# Altium PCB ELN2_LaboAntenna.PcbDoc
Units mm, origin at the board's own origin, x right, y up, seen from the top; angles counter-clockwise.
Board outline 35 x 35 mm, 4 copper layers (Top Layer, Layer 1, Layer 2, Bottom Layer), stack 1.536 mm thick; 5 components, 4 nets, 15 pads, 26 vias.
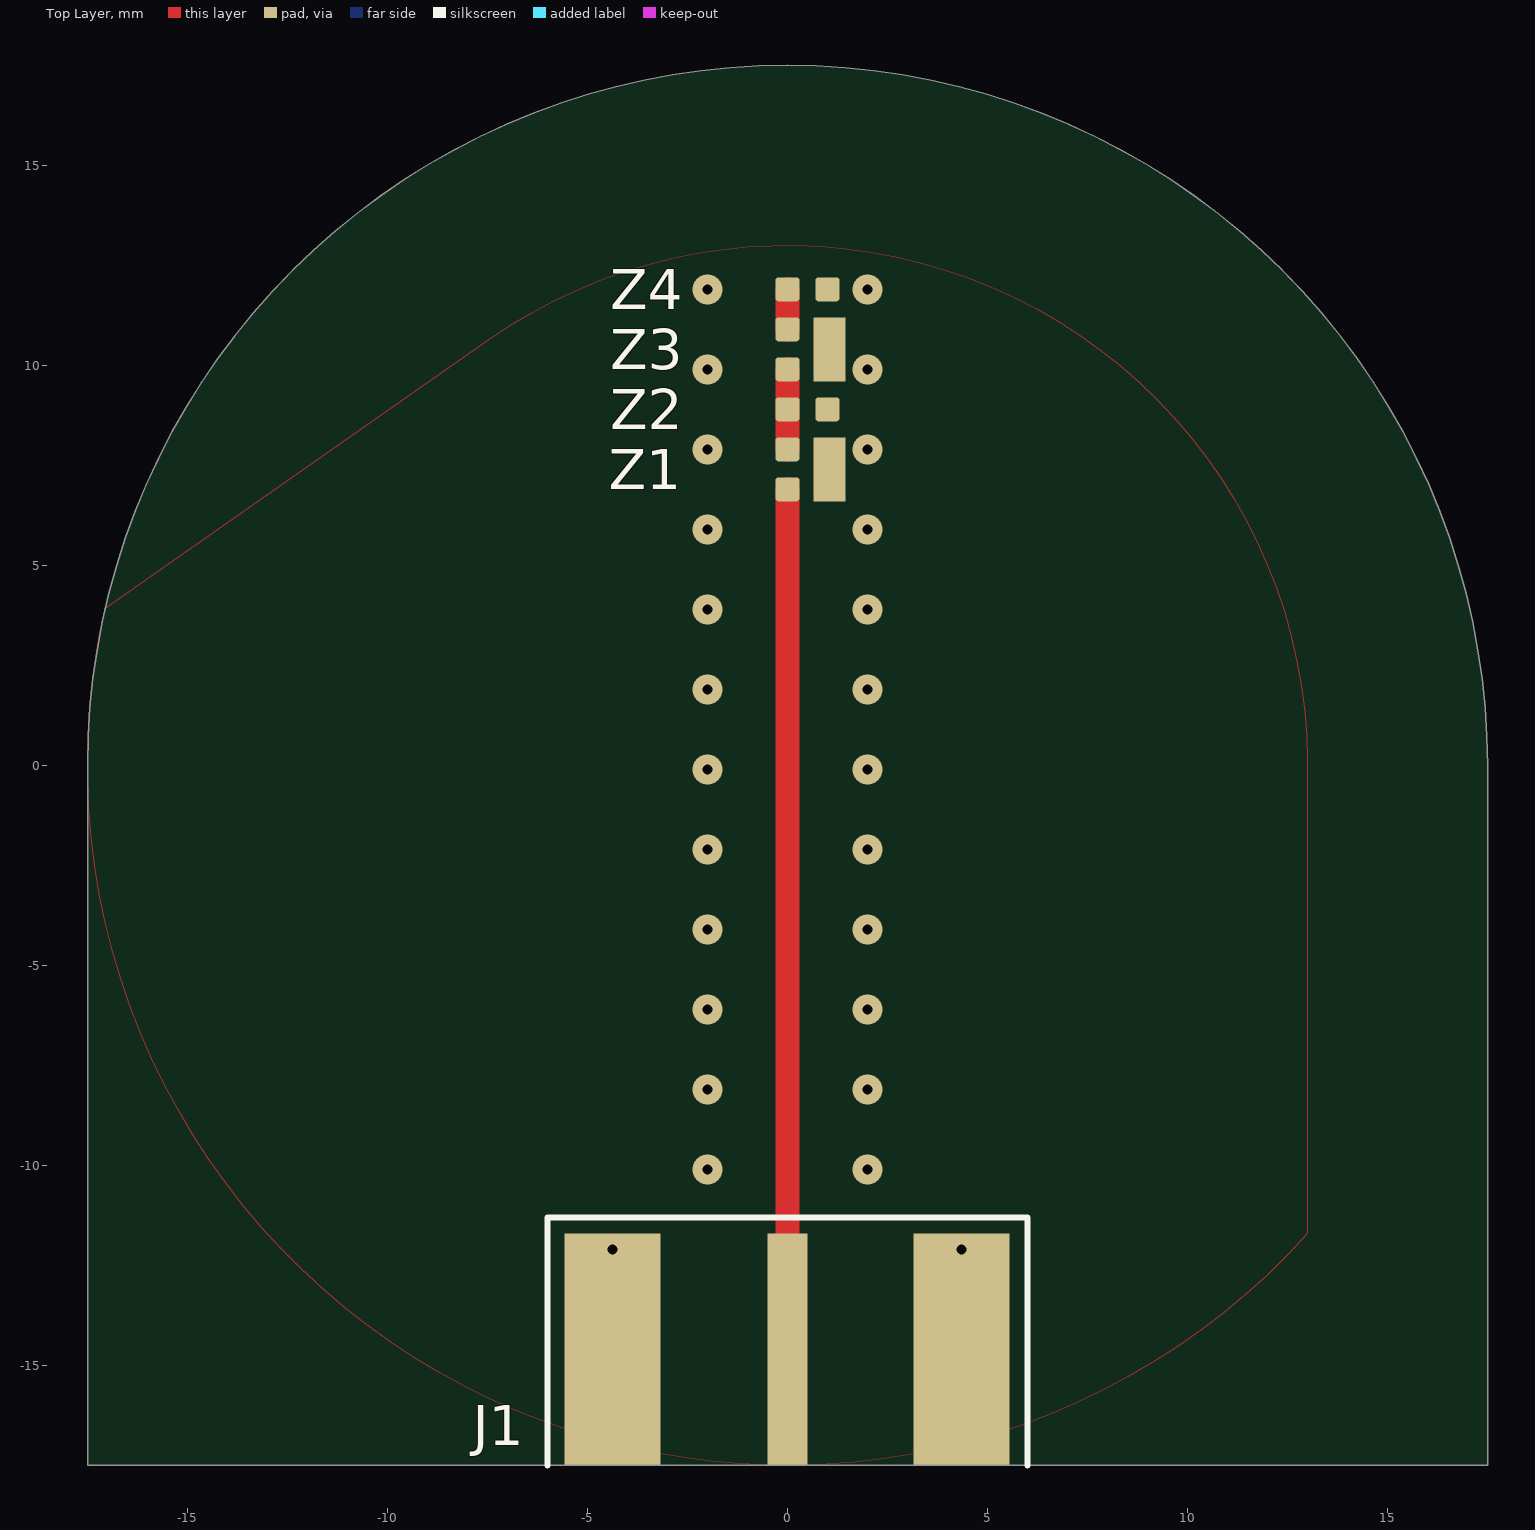
[diagram p0: Top Layer view]
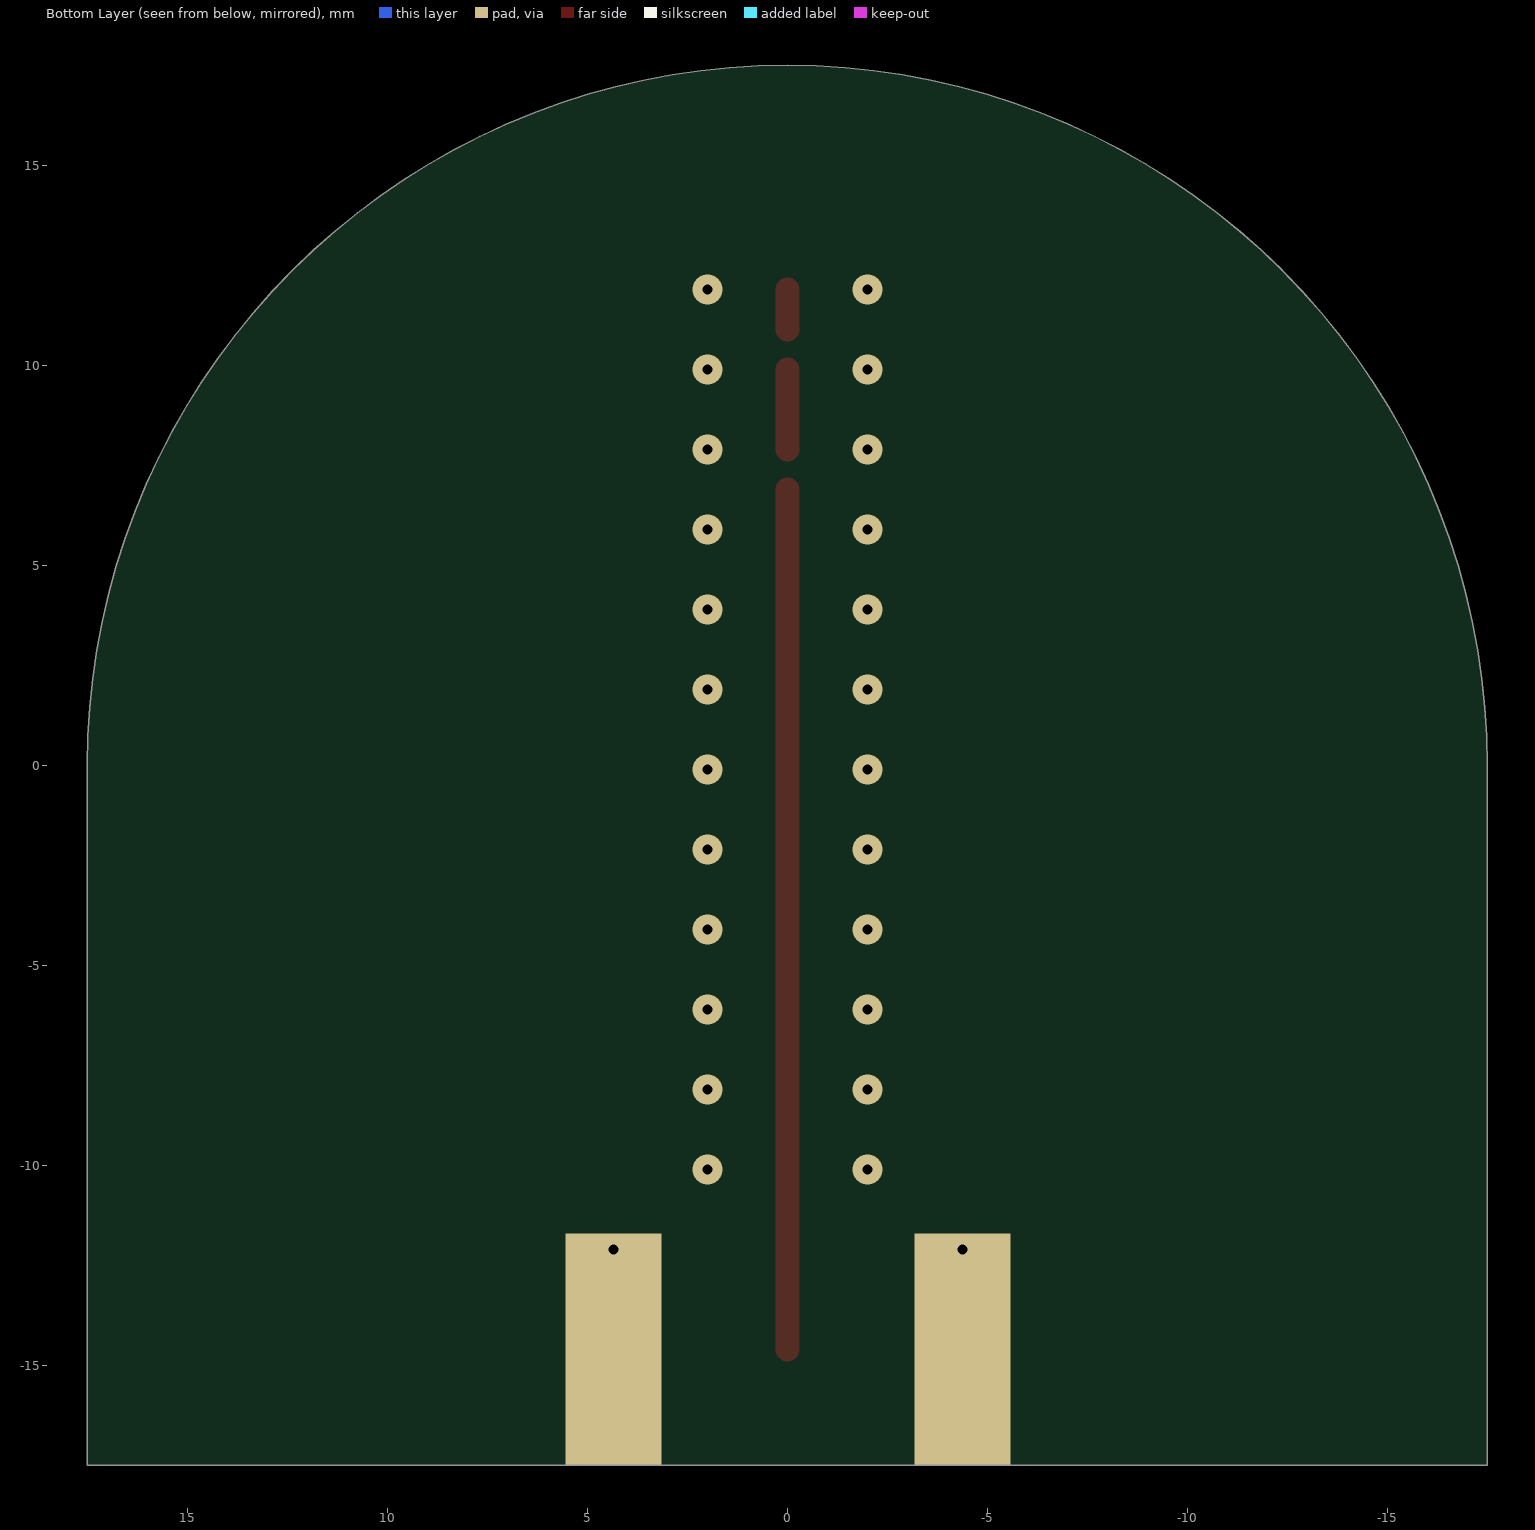
[diagram p1: Bottom Layer view, seen from below]
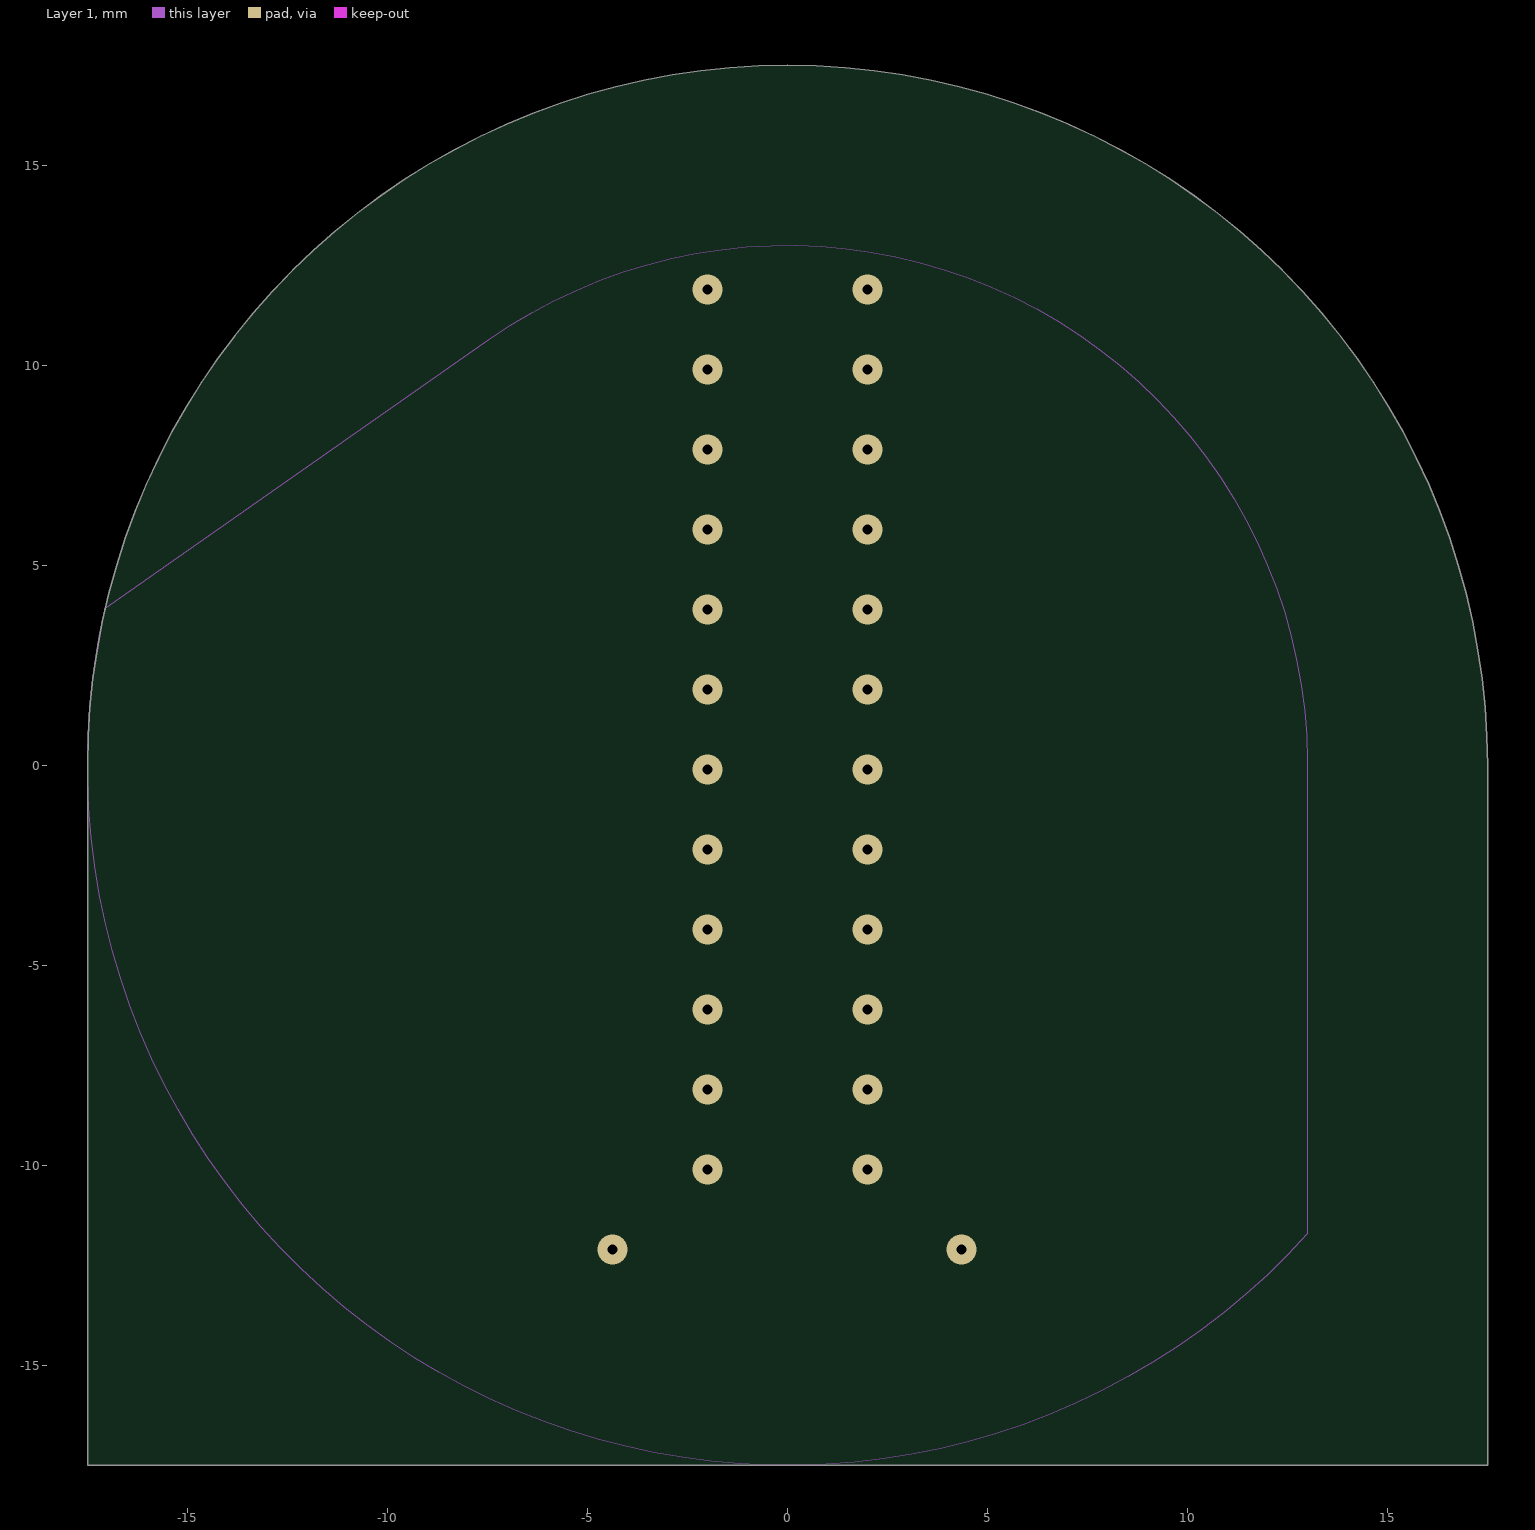
[diagram p2: Layer 1]

## Layer stack, top to bottom
Top Solder: solder mask 0.01, Solder Resist, Dk 3.5
Top Layer: signal copper 0.018
Dielectric 1: prepreg 0.36, PP-006, Dk 4.1
Layer 1: signal copper 0.035
Dielectric 2: prepreg 0.71, PP-006, Dk 4.1
Layer 2: signal copper 0.035
Dielectric1: core 0.36, FR-4, Dk 4.8
Bottom Layer: signal copper 0.018
Bottom Solder: solder mask 0.01, Solder Resist, Dk 3.5

## Board outline
-17.5,-17.5 -17.5,0 cw(c0,0) 17.5,0 17.5,-17.5

## Design rules (kind name [scope] priority, off if disabled: settings)
AssemblyTestPointUsage [All] p1 off:
AssemblyTestpoint [All] p1 off: testpointundercomponent=TRUE minsize=1.016 maxsize=2.54 preferedsize=1.524 minholesize=0 maxholesize=1.016 preferedholesize=0.813 testpointgrid=0.025 usegrid=TRUE gridtolerance=0 allowsidetop=TRUE allowsidebottom=TRUE
BoardOutlineClearance [All] p1 off: gap=0.25 ignorepadtopadclearanceinfootprint=FALSE except(0: Arc-SplitContinuation Track-SplitContinuation SMDPad-SplitContinuation THPad-SplitContinuation Via-SplitContinuation Fill-SplitContinuation Poly-SplitContinuation Region-SplitContinuation Text-SplitContinuation)
Clearance Clearance-xPP-xTP-xTT [All] p1: gap=0.25 ignorepadtopadclearanceinfootprint=FALSE
ComponentClearance [NOT ((InComponent('A1') OR InComponent('M3') OR InComponent('M4'))) vs NOT ((InComponent('A1') OR InComponent('M3') OR InComponent('M4')))] p1: gap=0.25 collisioncheckmode=3 verticalgap=0 showdistances=FALSE
DiffPairsRouting [All] p1: maxlimit=0.25 minlimit=0.25 mostfreqgap=0.25 toplayer_minwidth=0.381 toplayer_maxwidth=0.381 toplayer_prefwidth=0.381 midlayer1_minwidth=0.381 midlayer1_maxwidth=0.381 midlayer1_prefwidth=0.381 midlayer2_minwidth=0.381 midlayer2_maxwidth=0.381 midlayer2_prefwidth=0.381 bottomlayer_minwidth=0.381 bottomlayer_maxwidth=0.381 bottomlayer_prefwidth=0.381 maxuncoupledlength=12.5
Height [All] p1: minheight=0 maxheight=500 prefheight=12.5
HoleSize HoleSize-PTH [All] p1: absolutevalues=TRUE maxlimit=10 minlimit=0.15 maxpercent=80.000 minpercent=20.000
HoleToHoleClearance [All] p1: gap=0.35 allowstackedmicrovias=TRUE
MinimumAnnularRing "Minimum IAR  >0.45mm" [((ObjectKind = 'Pad') OR (ObjectKind = 'Via')) And (Layer = 'MultiLayer') And (HoleDiameter > AsMM(0.45))] p1: minimumring=0.175 // minimum inner annular ring for pads > 0.45mm finished hole size
MinimumAnnularRing "Minimum IAR <=0.45mm" [((ObjectKind = 'Pad') OR (ObjectKind = 'Via')) And (Layer = 'MultiLayer') And (HoleDiameter <= AsMM(0.45))] p2: minimumring=0.1 // minimum inner annular ring for pads <= 0.45mm finished hole size
MinimumSolderMaskSliver [All] p1: minsoldermaskwidth=0.08
PlaneClearance PlaneClearance-IPI [All] p1: clearance=0.25
PlaneConnect [All] p1: planeconnectstyle=Direct reliefexpansion=0.175 reliefentries=4 reliefconductorwidth=0.2 reliefairgap=0.2
PolygonConnect PolygonConnect-xTW [All] p1: connectstyle=Direct reliefconductorwidth=0.5 reliefentries=4 polygonreliefangle="90 Angle" airgapwidth=0.5
RoutingCorners [All] p1: cornerstyle=45-Degree minsetback=2.5 maxsetback=2.5
RoutingVias RoutingVias_1 [All] p1: holewidth=0.25 width=0.7 viastyle="Through Hole" minholewidth=0.25 minwidth=0.6 maxholewidth=0.25 maxwidth=1
SilkToSilkClearance [All] p1 off: silktosilkclearance=0.2
SilkToSolderMaskClearance SilkscreenOverComponentPads [IsPad] p1 off: minsilkscreentomaskgap=0.2 clearancetoexposedcopper=TRUE
SolderMaskExpansion [All] p1: expansion=0 istentingtop=FALSE
UnRoutedNet [All] p1: checkbadconnections=TRUE
Width Width-xTW [All] p1: maxlimit=5 minlimit=0.15 preferedwidth=0.3
16 further rules are at their usual default settings.

## Components (designator, comment, footprint, x,y, rotation, side; value= is the part's Value field where it differs from the comment)
J1 "CONSMA001-G" "SMA EDGE Molex 732511150" 0,-17.5 r90 top locked
Z1 "" "Matching pad 1005 with Ground" 0,7.401 r90 top locked
Z2 "*" "Matching pad 1005" 0.5,8.9 r180 top locked
Z3 "" "Matching pad 1005 with Ground" 0,10.4 r90 top locked
Z4 "*" "Matching pad 1005" 0.5,11.9 r180 top locked

## Footprints (in the part's own frame and the unit in brackets; to place one, negate y for a bottom-side part, rotate by r counter-clockwise, add the part's x,y. Pads: shape width x height; smd on the part's side, far side on the other; paste and mask are expansions set on the pad)
"Matching pad 1005" [mm] "Matching pad 1005"
  rrect25% 0.6x0.6 smd: 1(-0.5,0) 2(0.5,0)
  body extent -0.5,-0.28 0.5,0.28, height 0.25
"Matching pad 1005 with Ground" [mm] "Matching pad 1005 with Ground"
  rrect25% 0.6x0.6 smd: 1(-0.5,0) 2(0.5,0)
  rect 1.6x0.8 smd mask+0.05: 3(0,-1.048)
  body extent -0.5,-0.28 0.5,0.28, height 0.25
"SMA EDGE Molex 732511150" [mm] "Connector SMA, Board edge mount, SMA EDGE Molex 732511150"
  rect 5.8x1 smd: 1(2.9,0)
  rect 5.8x2.4 smd: 2(2.9,4.38) 2(2.9,-4.35)
  rect 5.8x2.4 smd far side: 2(2.9,4.38) 2(2.9,-4.35)
  silkscreen extent 0,-6 6.2,6, body extent -9.6,-4.76 4.67,4.76, height 4.36

## Part data
J1: library part "SMA EDGE Molex 732511150", "SMA EDGE Molex 732511150"
Z1 Z3: library part "Matching pad with ground", "Antenna matching pad with ground"
Z2 Z4: library part "Matching pad", "Matching pad"

## Via types
v1: diameter 0.75, hole 0.25, Top Layer to Bottom Layer, 26 vias

## Nets (pads, with @x,y where several pads share a name; then routed paths per layer and width w, separated by ;. In a path a pad name is that pad's centre, name@x,y a point inside that pad or via, vN(x,y) a via of type N, cw(c..) or ccw(c..) an arc to the next point about the centre after c; other vN are vias at no path point)
ANT: Z3.2 Z4.2 | length 1
  Top Layer w0.6: Z3.2 Z4.2
GND: J1.2 Z1.3 Z2.1 Z3.3 Z4.1
  other v1: -4.38,-12.1 4.35,-12.1 -2,-10.1 2,-10.1 -2,-8.1 2,-8.1 -2,-6.1 2,-6.1 -2,-4.1 2,-4.1 -2,-2.1 2,-2.1 -2,-0.1 2,-0.1 -2,1.9 2,1.9 -2,3.9 2,3.9 -2,5.9 2,5.9 -2,7.9 2,7.9 -2,9.9 2,9.9 -2,11.9 2,11.9
NetZ1_2: Z1.2 Z2.2 Z3.1 | length 2
  Top Layer w0.6: Z1.2 Z3.1
RFIN: J1.1 Z1.1 | length 21.5
  Top Layer w0.6: J1.1 Z1.1

## Polygon pours and split planes (outlines as drawn)
GND on Layer 1 "NONET_L02_P000" (solid, shelved, pour order 0): -17.053,3.929 -7.456,10.649 cw(c0,0) 13,0.113 12.999,-11.716 cw(c-0.001,-0.002)
GND on Top Layer "NONET_L01_P001" (solid, shelved, pour order 1): -17.053,3.929 -7.456,10.649 cw(c0,0) 13,0.113 12.999,-11.716 cw(c-0.001,-0.002)

## Other copper
Top Layer:
  pour cut-out: -1.5,-11.7 1.5,-11.7 1.5,-17.5 -1.5,-17.5
Layer 1:
  pour cut-out: -0.575,-11.7 0.575,-11.7 0.575,-17.5 -0.575,-17.5

## Silkscreen, mask and mechanical layers (free items; w line width, h text height)
Mechanical 1:
  circle w0.25: c0,0 r17.5
  lines w0.25: -17.5,-17.5 -17.5,0 cw(c0,0) 17.5,0 17.5,-17.5 -17.5,-17.5